# Altium PCB 底板.PcbDoc
Units mm, origin at the board's own origin, x right, y up, seen from the top; angles counter-clockwise.
Board outline 66.29 x 99.82 mm, 2 copper layers (Top Layer, Bottom Layer); 4 components, 0 nets, 40 pads, 0 vias.
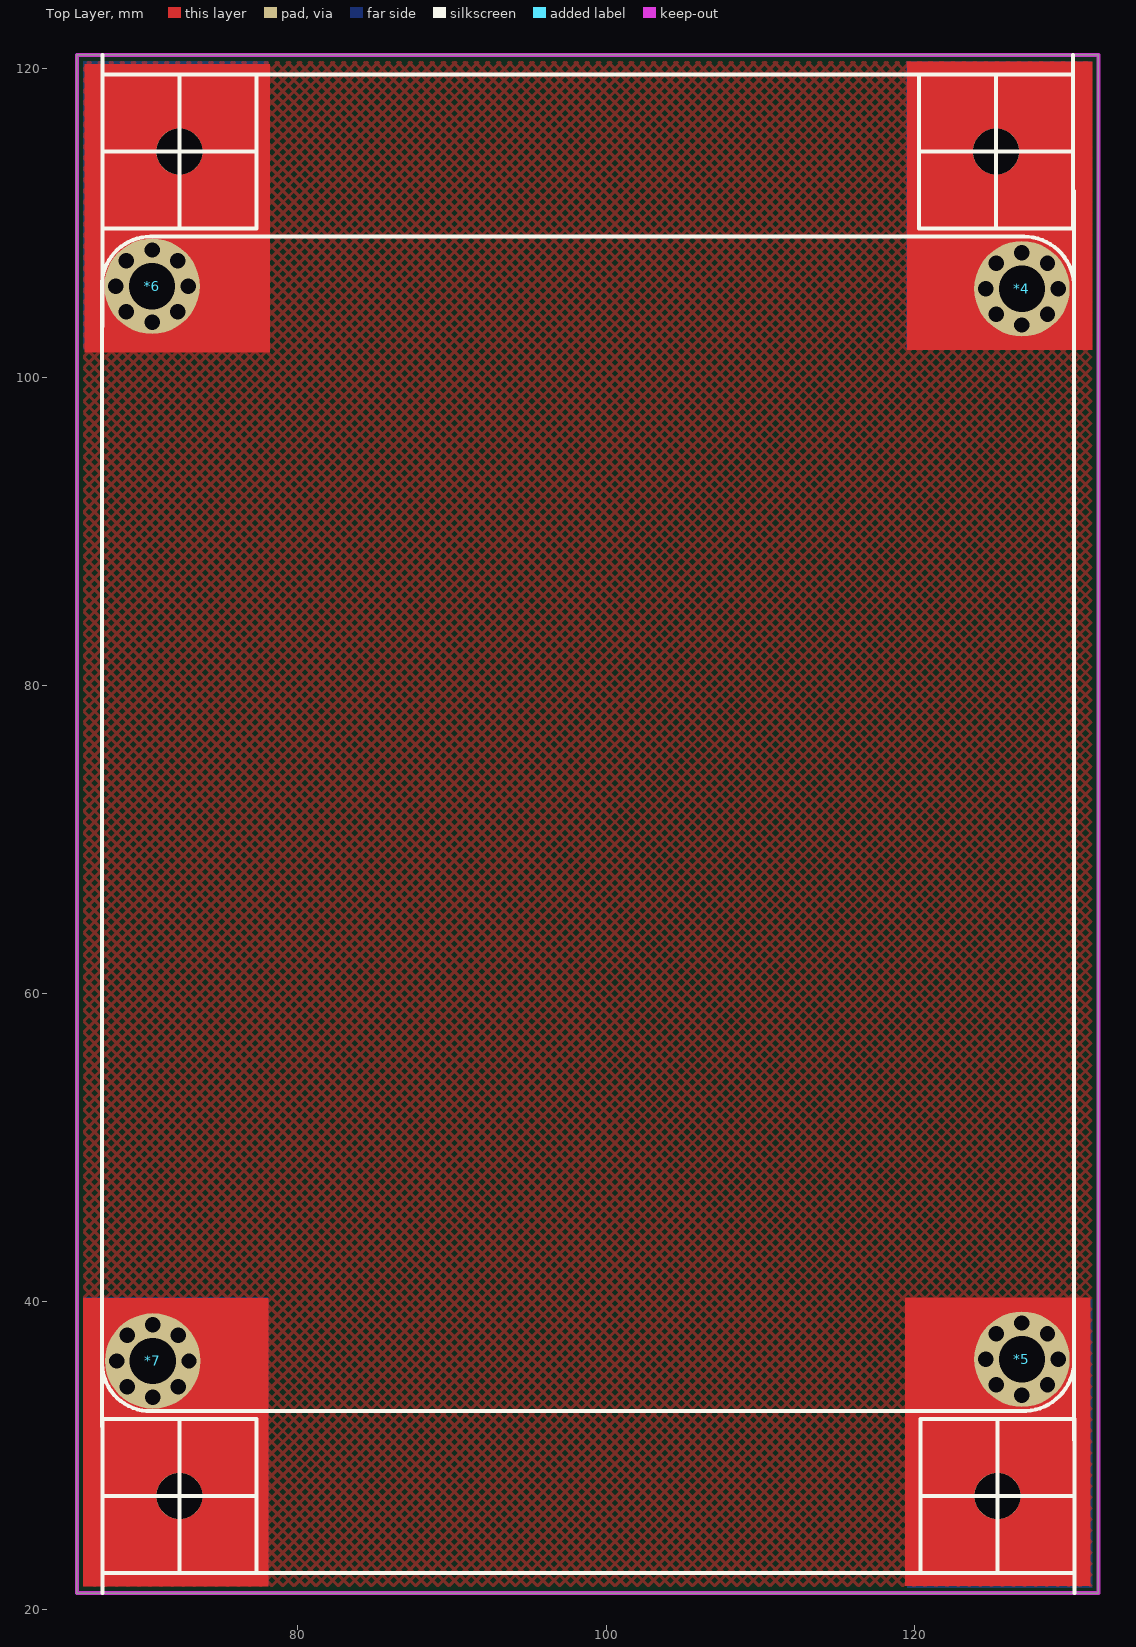
[diagram p0: Top Layer view]
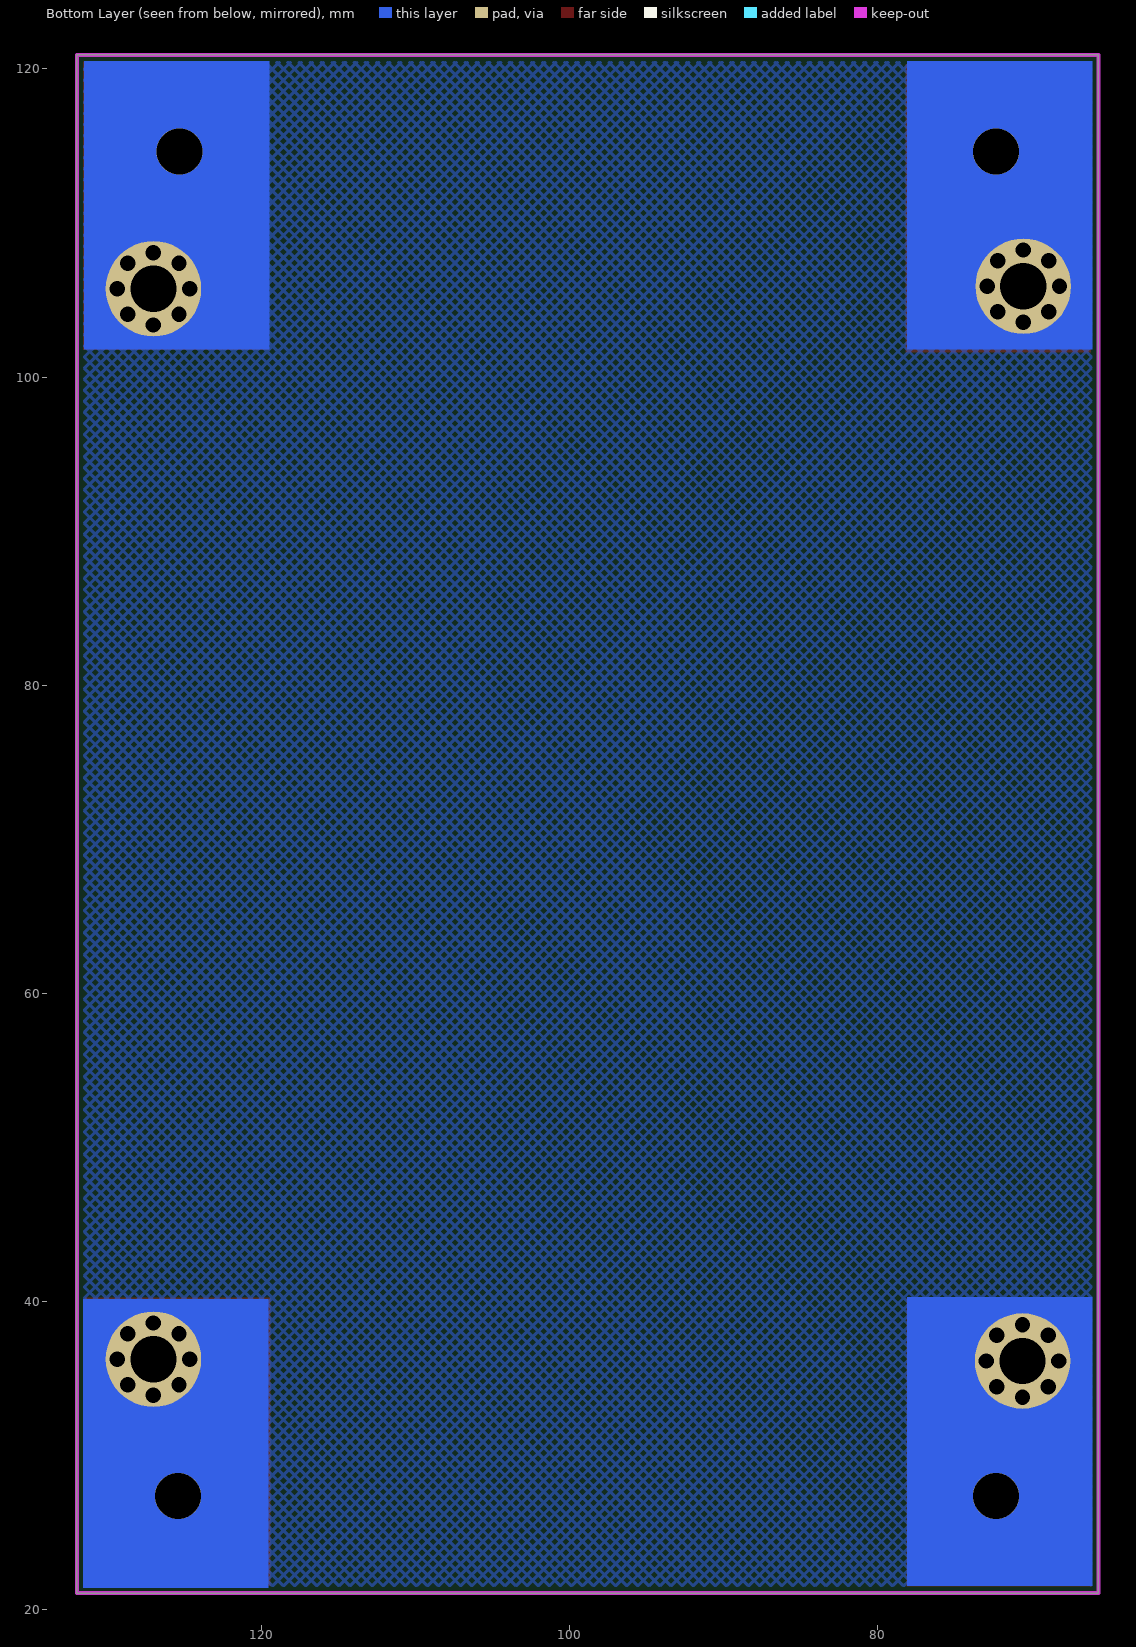
[diagram p1: Bottom Layer view, seen from below]

## Layer stack, top to bottom
Top Solder: solder mask 0.0102, Solder Resist, Dk 3.5
Top Layer: signal copper 0.0356
Dielectric 1: dielectric 0.32, FR-4, Dk 4.8
Bottom Layer: signal copper 0.0356
Bottom Solder: solder mask 0.0102, Solder Resist, Dk 3.5

## Board outline
65.659,21.082 131.953,21.082 131.953,120.904 65.659,120.904

## Design rules (kind name [scope] priority, off if disabled: settings)
Clearance [All] p1: gap=0.254
PolygonConnect [All] p1: connectstyle=Relief reliefconductorwidth=0.254 reliefentries=4 polygonreliefangle="90 Angle" airgapwidth=0.254
RoutingVias [All] p1: holewidth=0.711 width=1.27 viastyle="Through Hole" minholewidth=0.711 minwidth=1.27 maxholewidth=0.711 maxwidth=1.27
SolderMaskExpansion [All] p1: expansion=0.102
Width [All] p1: maxlimit=0.254 minlimit=0.254 preferedwidth=0.254
30 further rules are at their usual default settings.

## Components (designator, comment, footprint, x,y, rotation, side; value= is the part's Value field where it differs from the comment)
*4 "定位孔" 定位孔 126.987,105.727 r0 top locked
*5 "定位孔" 定位孔 126.987,36.258 r0 top locked
*6 "定位孔" 定位孔 70.536,105.893 r0 top locked
*7 "定位孔" 定位孔 70.587,36.144 r0 top locked

## Footprints (in the part's own frame and the unit in brackets; to place one, negate y for a bottom-side part, rotate by r counter-clockwise, add the part's x,y. Pads: shape width x height; smd on the part's side, far side on the other; paste and mask are expansions set on the pad)
定位孔 [mm]
  round 1 hole 1: 1(-2.35,0) 1(-1.662,-1.662) 1(-1.662,1.662) 1(0,-2.35) 1(0,2.35) 1(1.662,-1.662) 1(1.662,1.662) 1(2.35,0)
  round 6.2 hole 3: 1(0,0)

## Free pads (board coordinates)
  round 3 hole 3: 2(72.31,27.385) 2(72.31,114.634) 2(125.302,114.634) 2(125.396,27.385)

## Nets (pads, with @x,y where several pads share a name; then routed paths per layer and width w, separated by ;. In a path a pad name is that pad's centre, name@x,y a point inside that pad or via, vN(x,y) a via of type N, cw(c..) or ccw(c..) an arc to the next point about the centre after c; other vN are vias at no path point)
pads on no net: *4.1 *5.1 *6.1 *7.1

## Polygon pours and split planes (outlines as drawn)
no net on Bottom Layer "Keep-Out Layer-No Net" (hatched 45Degree grid 0.508 track 0.203, remove dead copper, pour order 4): 65.659,120.904 131.699,120.904 131.699,21.336 131.953,21.082 65.659,21.082 65.659,120.904
no net on Top Layer "Keep-Out Layer-No Net" (hatched 45Degree grid 0.508 track 0.203, remove dead copper, pour order 6): 65.659,121.123 131.699,121.123 131.699,21.555 131.953,21.301 65.659,21.301 65.659,121.123

## Keep-outs
Keep-Out Layer:
  the board outline again, w0.254

## Other copper
Top Layer:
  rectangle: 66.065,21.505 78.105,40.234
  rectangle: 119.405,21.53 131.445,40.258
  rectangle: 119.532,101.748 131.572,120.476
  rectangle: 66.142,101.6 78.181,120.328
Bottom Layer:
  rectangle: 119.524,21.423 131.564,40.152
  rectangle: 66.04,21.558 78.08,40.286
  rectangle: 119.456,101.795 131.496,120.523
  rectangle: 66.04,101.795 78.08,120.523

## Silkscreen, mask and mechanical layers (free items; w line width, h text height)
Top Overlay:
  lines w0.254: 67.285,36.195 67.285,105.918 cw(c70.46,105.943) 70.434,109.118 112.674,109.118 115.849,109.118 116.002,109.118 127.127,109.118 cw(c127.089,105.829) 130.378,105.791 130.378,112.065 ; 67.295,31.892 67.295,36.297 ; 67.295,35.941 ccw(c70.414,36.012) 70.485,32.893 112.776,32.893 115.71,32.893 126.949,32.893 ccw(c127.076,36.195) 130.378,36.068 ; 67.31,21.082 67.31,22.39 ; 67.31,27.385 77.31,27.385 ; 67.31,103.276 67.31,110.236 ; 67.31,114.634 77.31,114.634 ; 67.31,120.904 67.31,119.634 ; 72.31,22.385 72.31,32.385 ; 72.31,109.634 72.31,119.634 ; 77.216,22.385 120.396,22.385 ; 120.302,114.634 130.302,114.634 ; 120.396,27.385 130.396,27.385 ; 125.302,109.634 125.302,119.634 ; 125.396,22.385 125.396,32.385 ; 130.302,119.507 130.302,120.904 ; 130.378,31.006 130.378,36.449 ; 130.378,36.246 130.378,105.918 ; 130.396,21.082 130.396,22.385 ; 67.31,119.634 77.31,119.634 ; 67.31,119.634 67.31,109.634 77.31,109.634 77.31,119.634 ; 77.31,119.634 120.302,119.634 ; 120.302,119.634 120.302,109.634 130.302,109.634 130.302,119.634 120.302,119.634 ; 120.396,22.385 130.396,22.385 ; 120.396,22.385 120.396,32.385 130.396,32.385 130.396,22.385 ; 67.31,22.385 77.31,22.385 77.31,32.385 67.31,32.385 67.31,22.385
Top Solder:
  rectangle: 67.437,109.601 77.47,119.634
  rectangle: 120.396,109.728 130.429,119.761
  rectangle: 120.269,22.352 130.302,32.385
  rectangle: 67.31,22.352 77.343,32.385